# EAGLE board tiny13_charlie4_50mm_2xAAA_optical (EAGLE 6.2)

Size 100 x 50 mm. Coordinates in mm from the lower left corner, seen from the top.
Outline: 25.44,22.32 94.38,49.62 99.17,38.08 6.2,0.82 1.42,12.37 19.43,19.83
Outline: 24.9,21.01 20.74,19.29
Outline: 0,0 0,50 100,50 100,0 0,0
Copper layers (1*16): Top 0.035mm / dielectric 1.5mm / Bottom 0.035mm
Design rules: minimum track width 8mil, minimum drill 24mil, track to track 6mil, track to pad 6mil, pad to pad 6mil, via to via 6mil, smd to smd 0mil, copper to edge 10mil, drill to drill 8mil, minimum pad ring 10mil, minimum via ring 8mil, stop-mask expansion 4mil, vias tented up to drill 0mil, thermal gap 10mil

## Footprints (pad centres in the part's own frame; a part is rotated, then mirrored left to right if it is on the bottom)
C025-025X050 = drill 0.813 octagon: 1 -1.27,0; 2 1.27,0
8S1 = smd 0.6 x 1.6: 1 -1.905,-2.654; 2 -0.645,-2.654; 3 0.625,-2.654; 4 1.895,-2.654; 5 1.905,2.654; 6 0.635,2.654; 7 -0.635,2.654; 8 -1.905,2.654
AVR-ISP-6 = drill 1.016 square: 1 -2.54,-1.27 | drill 1.016 octagon: 2 -2.54,1.27; 3 0,-1.27; 4 0,1.27; 5 2.54,-1.27; 6 2.54,1.27
LED3MM = drill 0.813 octagon: A -1.27,0; K 1.27,0
0204/5 = drill 0.813 octagon: 1 -2.54,0; 2 2.54,0
TILT_SWITCH_VAR = drill 0.7 pad 1.422: P$1 2.25,1.25; P$2 2.25,3.75
CONTACT_ISP_PROGRAMMER_1X6_ATMEL = smd 1.93 x 3.81: GND 6.35,0; MISO -6.35,0; MOSI 3.81,0; RST -1.27,0; SCK -3.81,0; VCC 1.27,0
AAA_THROUGH_HOLE = drill 1: P$1 2.8,6.3; P$2 47.3,6.3
SWITCH = drill 0.6: 1 2.25,6.25; 2 2.25,4.25; 3 2.25,2.25 | drill 1.2 square: C1 2.25,8.5; C2 2.25,0

## Placement (x,y rotation side)
C1  [C025-025X050]  15.07,8.55 112.5 top
IC1  TINY13-20SSU  [8S1]  34.08,14.9 292.5 top
JP1  AVR-ISP-6  [AVR-ISP-6]  15.56,14.16 202.5 top
LED1  [LED3MM]  29.93,19.68 22.5 top
LED2  [LED3MM]  35.48,21.98 22.5 top
LED3  [LED3MM]  41.02,24.27 22.5 top
LED4  [LED3MM]  46.56,26.57 22.5 top
LED5  [LED3MM]  52.11,28.87 22.5 top
LED6  [LED3MM]  57.65,31.16 22.5 top
LED7  [LED3MM]  63.19,33.46 22.5 top
LED8  [LED3MM]  68.74,35.75 22.5 top
LED9  [LED3MM]  74.28,38.05 22.5 top
LED10  [LED3MM]  79.82,40.35 22.5 top
LED11  [LED3MM]  85.37,42.64 22.5 top
LED12  [LED3MM]  90.91,44.94 22.5 top
R1  [0204/5]  20.03,9.25 202.5 top
R2  [0204/5]  19.07,11.56 202.5 top
U$1  TILT_SWITCH_WRAP  [TILT_SWITCH_VAR]  20.22,19.88 292.5 top
U$2  AVR_ISP_6_PIN_1X6_SMT_CONTACT_BIG  [CONTACT_ISP_PROGRAMMER_1X6_ATMEL]  88.93,36 202.5 top
U$3  1XAAA  [AAA_THROUGH_HOLE]  1.42,12.37 157.5 bottom
U$4  SWITCH  [SWITCH]  8.72,13.17 202.5 top
U$5  1XAAA  [AAA_THROUGH_HOLE]  48.19,30.49 157.5 bottom

## Library data of the parts
C1 R1 R2 = resistor
IC1 = atmel; MPN: ATTINY13-20SSU; OC_FARNELL: 1455133; OC_NEWARK: 58M3771
JP1 = avr-5
LED1-LED12 = 0-svo
U$1-U$5 = Mrule

## Nets
GND: C1.2 IC1.4 JP1.6 U$1.P$1 U$2.GND U$4.1
N$1: IC1.2 LED3.K LED4.A LED5.K LED6.A LED7.A LED8.K
N$2: IC1.7 JP1.3 LED1.K LED2.A LED3.A LED4.K LED11.A LED12.K U$2.SCK
N$3: R2.1 U$1.P$2
N$4: IC1.3 LED7.K LED8.A LED9.K LED10.A LED11.K LED12.A
N$5: IC1.5 JP1.4 R2.2 U$2.MOSI
N$6: IC1.1 JP1.5 R1.2 U$2.RST
N$7: U$3.P$2 U$5.P$1
N$8: IC1.6 JP1.1 LED1.A LED2.K LED5.A LED6.K LED9.A LED10.K U$2.MISO
N$9: U$4.2 U$5.P$2
VCC: C1.1 IC1.8 JP1.2 R1.1 U$2.VCC U$3.P$1

## Tracks (layer width: path | path; a pad name or v marks a point on that pad's centre or on a via)
GND  (5 unrouted)
N$1  (6 unrouted)
N$2  (8 unrouted)
N$3  (1 unrouted)
N$4  (6 unrouted)
N$5  (3 unrouted)
N$6  (3 unrouted)
N$7  (1 unrouted)
N$8  (8 unrouted)
N$9  (1 unrouted)
VCC  (5 unrouted)